# Altium PCB PCB2.PcbDoc
Units mm, origin at the board's own origin, x right, y up, seen from the top; angles counter-clockwise.
Board outline 76.2 x 72.39 mm, 2 copper layers (Top Layer, Bottom Layer); 20 components, 25 nets, 102 pads, 0 vias.
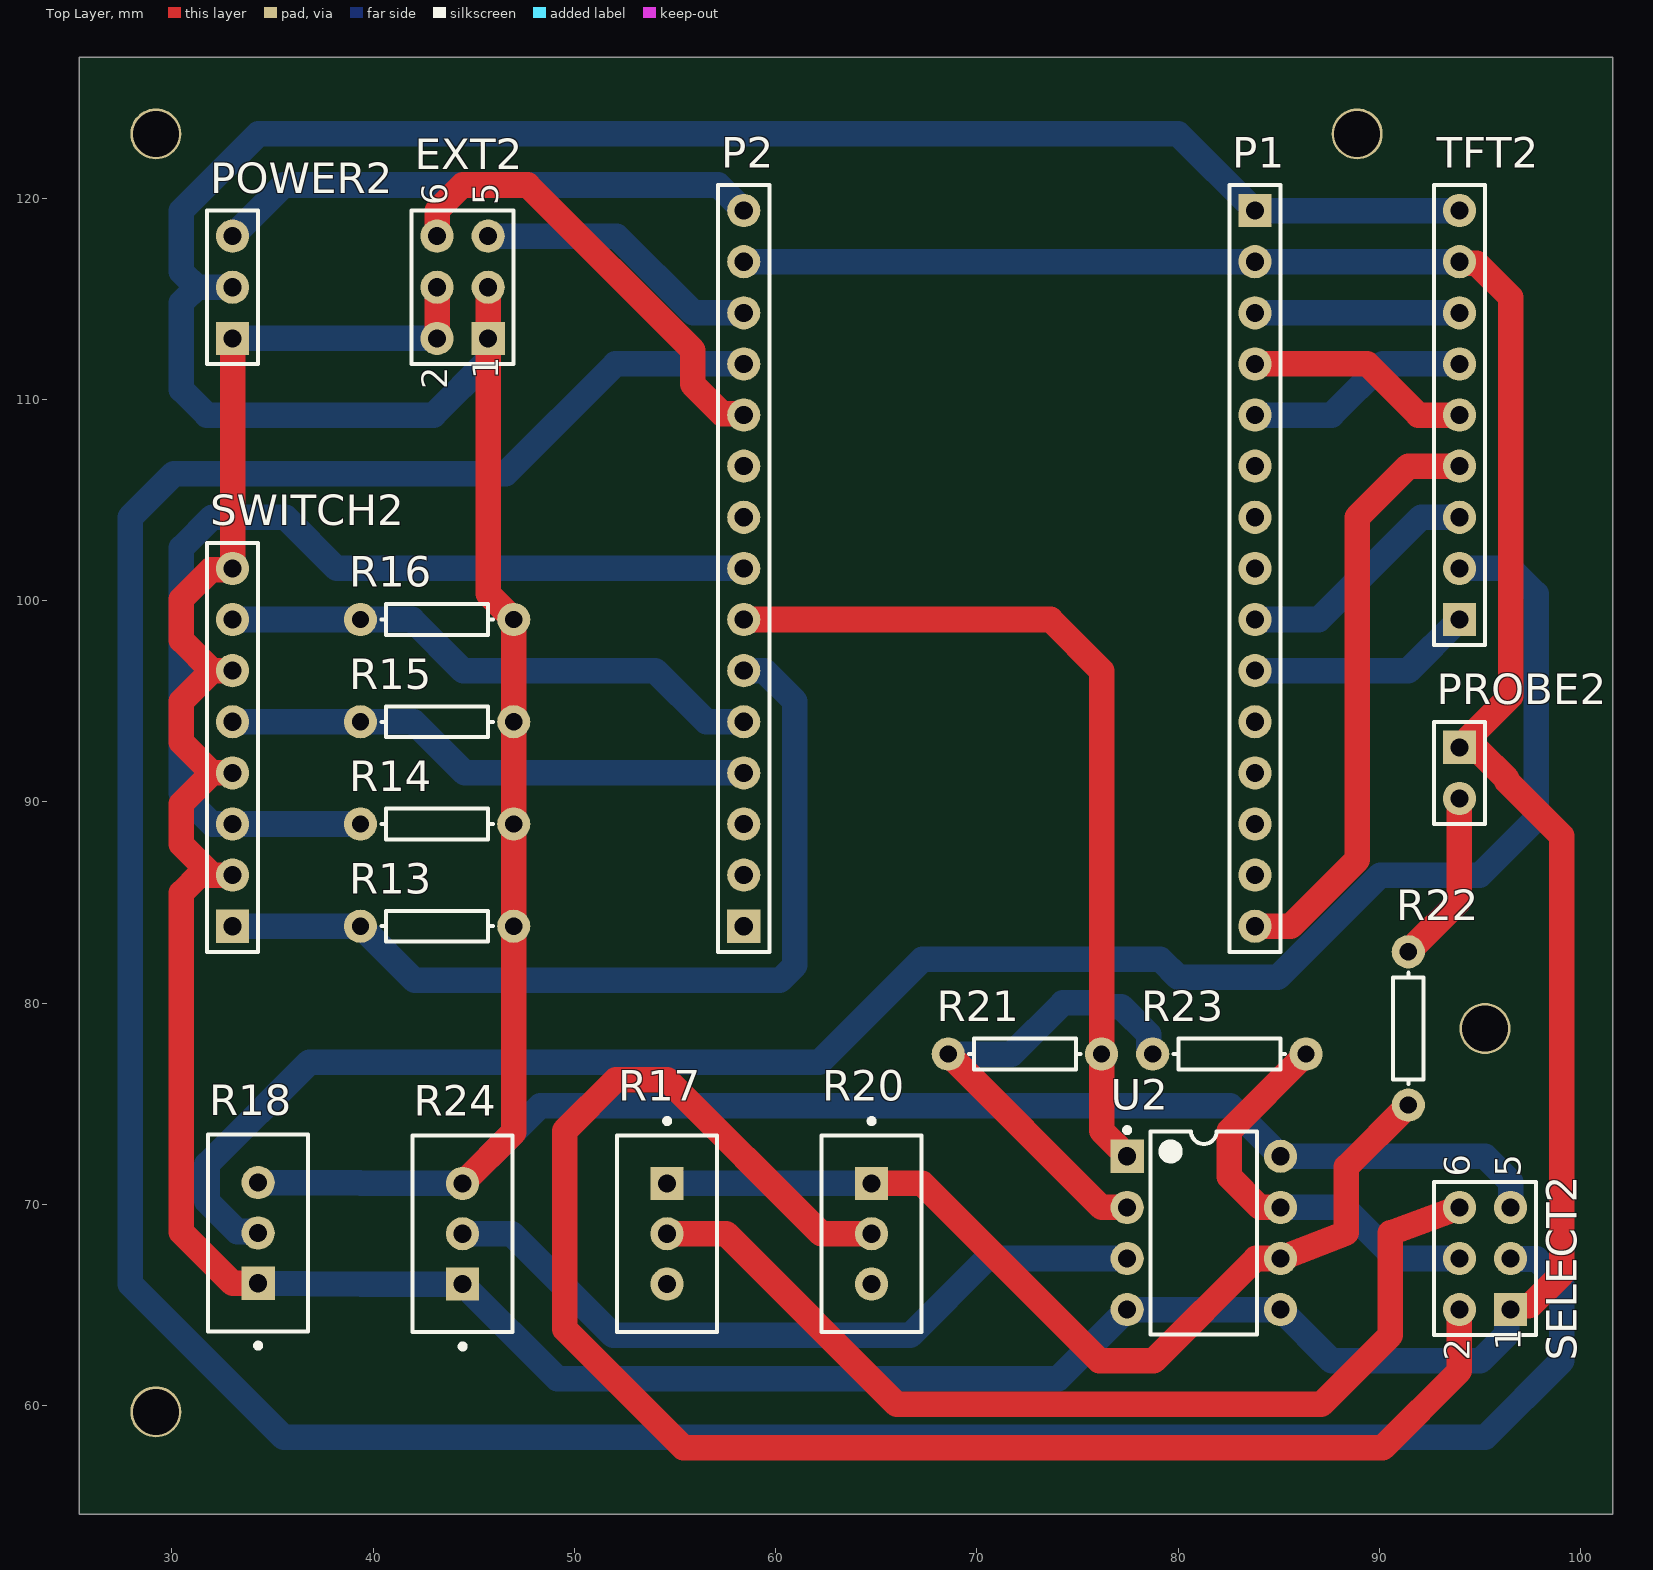
[diagram p0: Top Layer view]
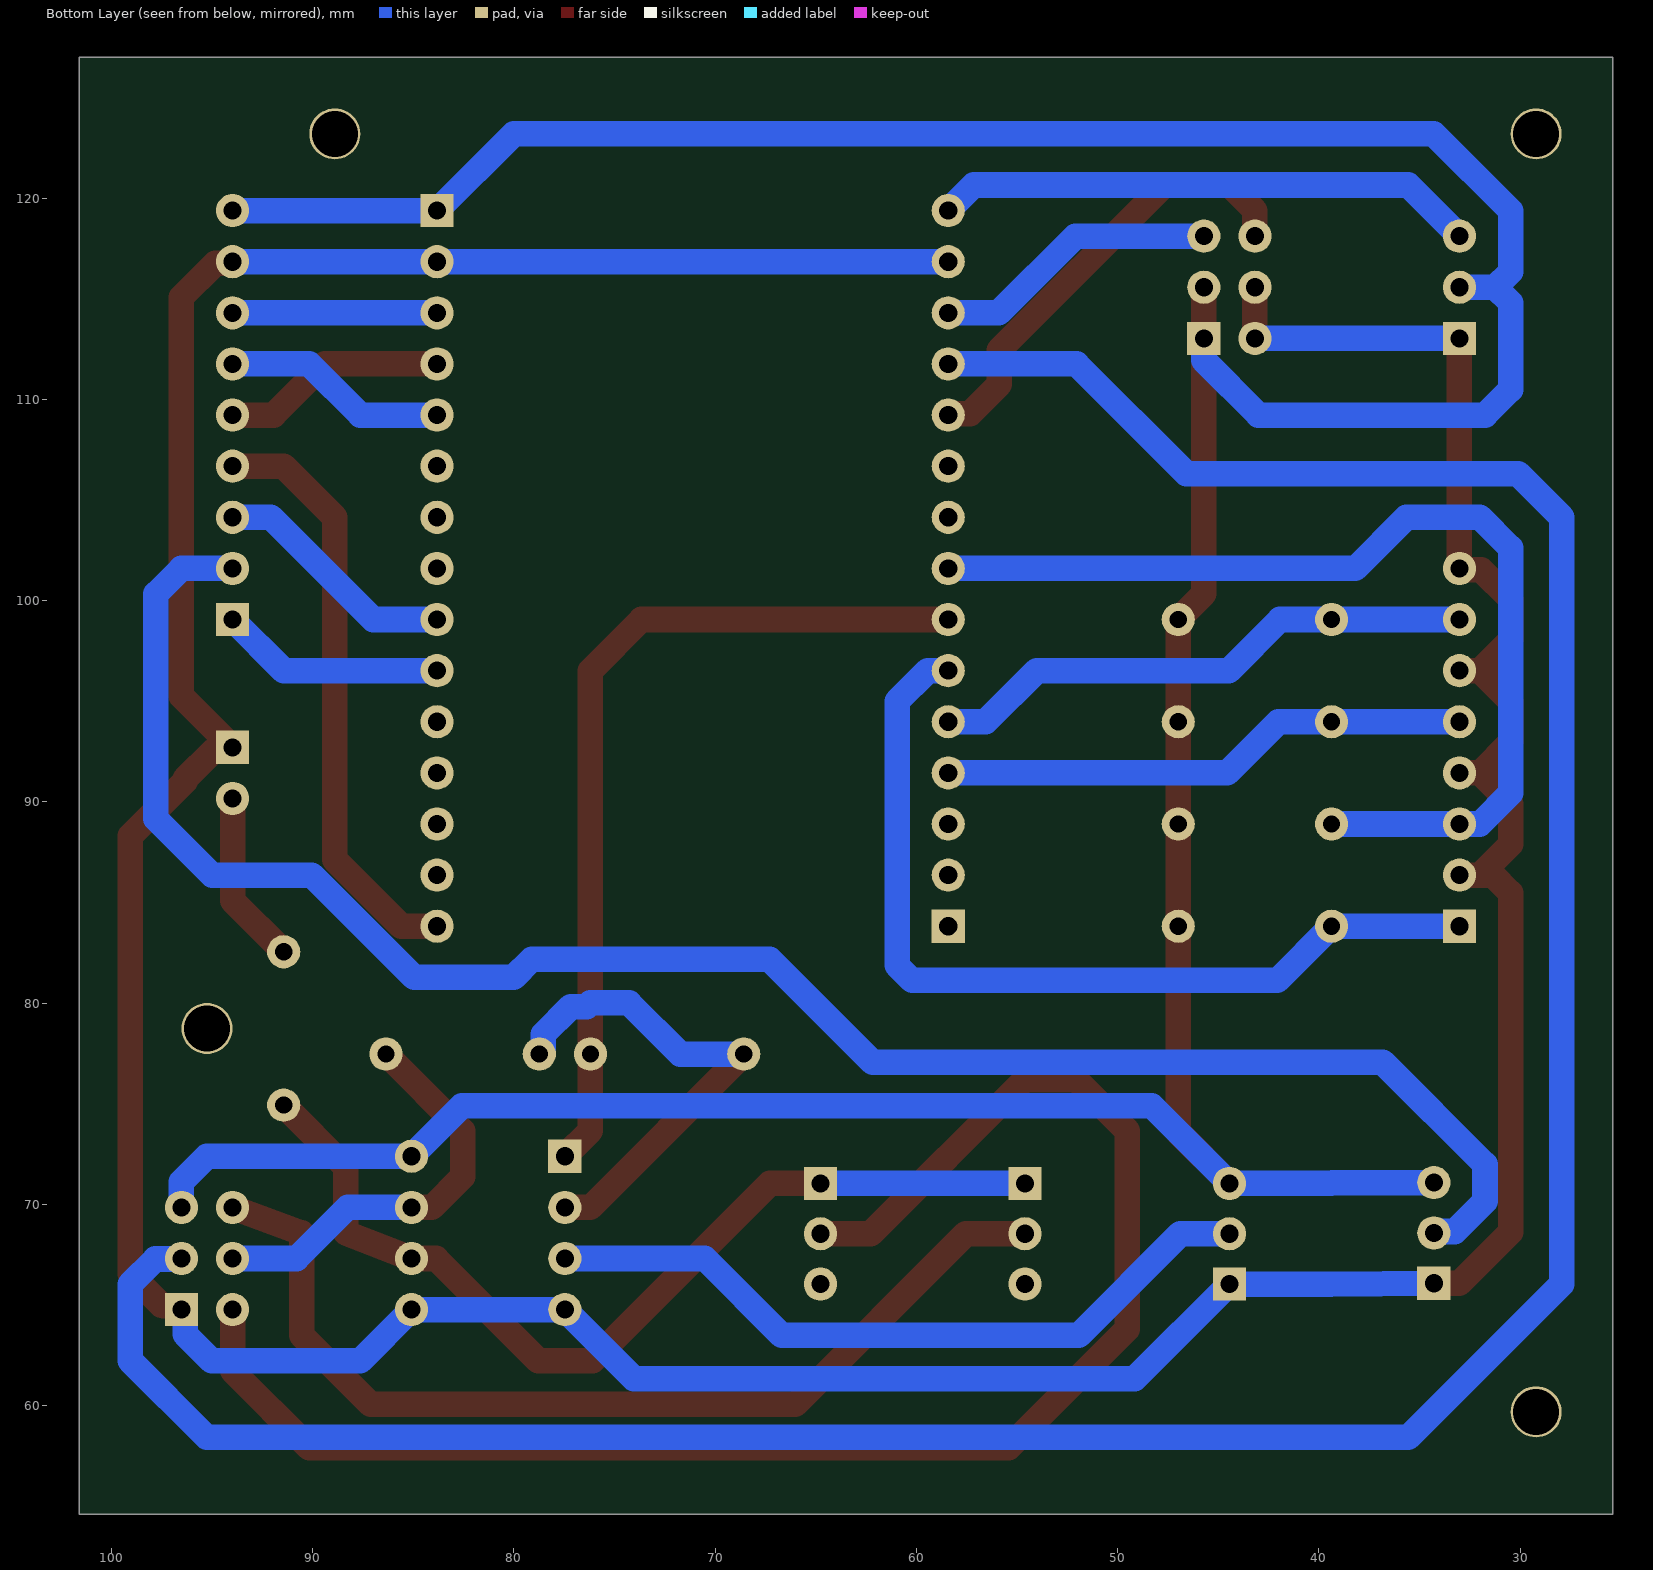
[diagram p1: Bottom Layer view, seen from below]

## Layer stack, top to bottom
Top Solder: solder mask 0.0102, Solder Resist, Dk 3.5
Top Layer: signal copper 0.0356
Dielectric 1: dielectric 0.32, FR-4, Dk 4.8
Bottom Layer: signal copper 0.0356
Bottom Solder: solder mask 0.0102, Solder Resist, Dk 3.5

## Board outline
25.4,54.61 101.6,54.61 101.6,127 25.4,127

## Design rules (kind name [scope] priority, off if disabled: settings)
Clearance [All] p1: gap=0.889 ignorepadtopadclearanceinfootprint=FALSE except(0: Arc-Hole Track-Hole SMDPad-Hole THPad-Hole Via-Hole Fill-Hole Poly-Hole Region-Hole Text-Hole; 0.838: THPad-THPad)
PolygonConnect [All] p1: connectstyle=Relief reliefconductorwidth=0.254 reliefentries=4 polygonreliefangle="90 Angle" airgapwidth=0.254
RoutingVias [All] p1: holewidth=0.711 width=1.27 viastyle="Through Hole" minholewidth=0.711 minwidth=1.27 maxholewidth=0.711 maxwidth=1.27
SolderMaskExpansion [All] p1: expansion=0.102 istentingtop=FALSE
Width [All] p1: maxlimit=1.524 minlimit=1.016 preferedwidth=1.27 minimp=50.000000 maximp=50.000000 favimp=50.000000
30 further rules are at their usual default settings.

## Components (designator, comment, footprint, x,y, rotation, side; value= is the part's Value field where it differs from the comment)
EXT2 "Header 3X2" HDR2X3 45.72,113.03 r90 top
P1 "Header 15" HDR1X15 83.82,119.38 r270 top
P2 "Header 15" HDR1X15 58.42,83.82 r90 top
POWER2 "Header 3" HDR1X3 33.02,113.03 r90 top
PROBE2 "Header 2" HDR1X2 93.98,92.71 r270 top
R13 "Res1" AXIAL-0.3 43.18,83.82 r0 top value=10K
R14 "Res1" AXIAL-0.3 43.18,88.9 r0 top value=10K
R15 "Res1" AXIAL-0.3 43.18,93.98 r0 top value=10K
R16 "Res1" AXIAL-0.3 43.18,99.06 r0 top value=10K
R17 "10K" FP-PV36W-MFG 54.61,68.54 r90 top value=1kΩ
R18 "PV36W102C01B00" FP-PV36W-MFG 34.29,68.58 r270 top value=1kΩ
R20 "100K" FP-PV36W-MFG 64.77,68.54 r90 top value=1kΩ
R21 "Res1" AXIAL-0.3 72.39,77.47 r180 top value=100K
R22 "Res1" AXIAL-0.3 91.44,78.74 r90 top value=100K
R23 "Res1" AXIAL-0.3 82.55,77.47 r0 top value=100K
R24 "100K" FP-PV36W-MFG 44.45,68.54 r270 top value=1kΩ
SELECT2 "Header 3X2" HDR2X3 96.52,64.77 r90 top
SWITCH2 "Header 8" HDR1X8 33.02,83.82 r90 top
TFT2 "Header 9" HDR1X9 93.98,99.06 r90 top
U2 "LM358N" ONSC-PDIP-8-626-05_M 81.28,68.58 r0 top

## Footprints (in the part's own frame and the unit in brackets; to place one, negate y for a bottom-side part, rotate by r counter-clockwise, add the part's x,y. Pads: shape width x height; smd on the part's side, far side on the other; paste and mask are expansions set on the pad)
AXIAL-0.3 [mil] "Axial Device, Thru-Hole; 2 Leads; 0.3 in Pin Spacing"
  round 65 hole 33.46: 1(-150,0) 2(150,0)
  silkscreen extent -109,-30 109,30
FP-PV36W-MFG [mil]
  rect 65x65 hole 35.43 paste-39370.1 mask+0: 1(98.42,0)
  round 65 hole 35.43 paste-39370.1 mask+0: 2(0,0) 3(-98.43,0)
  silkscreen extent -193,-98 225,98, body extent -196,-102 196,102, height 10
HDR1X2 [mil] "Connector; Header; 2 Position"
  rect 65x65 hole 35.43: 1(0,0)
  round 65 hole 35.43: 2(100,0)
  silkscreen extent -50,-50 150,50
HDR1X3 [mil] "Connector; Header; 3 Position"
  rect 65x65 hole 35.43: 1(0,0)
  round 65 hole 35.43: 2(100,0) 3(200,0)
  silkscreen extent -50,-50 250,50
HDR1X8 [mil] "Connector; Header; 8 Position"
  rect 65x65 hole 35.43: 1(0,0)
  round 65 hole 35.43: 2(100,0) 3(200,0) 4(300,0) 5(400,0) 6(500,0) 7(600,0) 8(700,0)
  silkscreen extent -50,-50 750,50
HDR1X9 [mil] "Connector; Header; 9 Position"
  rect 65x65 hole 35.43: 1(0,0)
  round 65 hole 35.43: 2(100,0) 3(200,0) 4(300,0) 5(400,0) 6(500,0) 7(600,0) 8(700,0) 9(800,0)
  silkscreen extent -50,-50 850,50
HDR1X15 [mil] "Connector; Header; 15 Position"
  rect 65x65 hole 35.43: 1(0,0)
  round 65 hole 35.43: 2(100,0) 3(200,0) 4(300,0) 5(400,0) 6(500,0) 7(600,0) 8(700,0) 9(800,0) 10(900,0) 11(1000,0) 12(1100,0) 13(1200,0) 14(1300,0) 15(1400,0)
  silkscreen extent -50,-50 1450,50
HDR2X3 [mil] "Connector; Header; 3x2 Position"
  rect 65x65 hole 35.43: 1(0,0)
  round 65 hole 35.43: 2(0,100) 3(100,0) 4(100,100) 5(200,0) 6(200,100)
  silkscreen extent -50,-50 250,150
ONSC-PDIP-8-626-05_M [mil] "DIP, 8-Leads, Body 10x7.1mm, Pitch 2.54mm"
  rect 65x65 hole 35.43: 1(-150,150)
  round 65 hole 35.43: 2(-150,50) 3(-150,-50) 4(-150,-150) 5(150,-150) 6(150,-50) 7(150,50) 8(150,150)
  silkscreen extent -155,-199 104,206, body extent -155,-197 155,197, height 210

## Part data
EXT2 SELECT2: "Header, 3-Pin, Dual row", LatestRevisionDate=17-Jul-2002, LatestRevisionNote="Re-released for DXP Platform.", Publisher="Altium Limited"
P1 P2: "Header, 15-Pin", LatestRevisionDate=17-Jul-2002, LatestRevisionNote="Re-released for DXP Platform.", Publisher="Altium Limited"
POWER2: "Header, 3-Pin", LatestRevisionDate=17-Jul-2002, LatestRevisionNote="Re-released for DXP Platform.", Publisher="Altium Limited"
PROBE2: "Header, 2-Pin", LatestRevisionDate=17-Jul-2002, LatestRevisionNote="Re-released for DXP Platform.", Publisher="Altium Limited"
R13 R14 R15 R16 R21 R22 R23: "Resistor", LatestRevisionDate=17-Jul-2002, LatestRevisionNote="Re-released for DXP Platform.", PackageDescription="Axial Device, Thru-Hole; 2 Leads; 0.3 in Pin Spacing", PackageReference=AXIAL-0.3, Published=8-Jun-2000, Publisher="Altium Limited"
R17 R20 R24: library part CMP-07234-000009-1, "TRIMMER 1K OHM 0.5W PC PIN TOP", Manufacturer=Bourns, Manufacturer Part Number=PV36W102C01B00, Package=PV36W, Power Rating=0.5W, Resistance=1kΩ, Temperature="-55°C to +125°C", Temperature Coefficient=100ppm/°C, Temperature Range High=+125°C, Temperature Range Low=-55°C, Tolerance=10%, Automotive=No, Category=Res, ComponentLink2Description=Datasheet, ComponentLink2URL=https://www.bourns.com/docs/Product-Datasheets/pv36.pdf, Composition=Cermet, Device Class L1="Passive Components", Device Class L2=Resistors, Device Class L3="Variable Resistors and Potentiometers", Digikey Description="TRIMMER 1K OHM 0.5W PC PIN TOP", Height=12.05mm, Lead Free=Yes, Mouser Description="Trimmer Resistors - Through Hole 1.0Kohms 10mm Square 25turn", Octopart=https://octopart.com/pv36w102c01b00-bourns-71612321, RoHS=TRUE, Series=PV36, Standoff Height=0.38mm
R18: library part CMP-07234-000009-1, "TRIMMER 1K OHM 0.5W PC PIN TOP", Manufacturer=Bourns, Package=PV36W, Power Rating=0.5W, Resistance=1kΩ, Temperature="-55°C to +125°C", Temperature Coefficient=100ppm/°C, Temperature Range High=+125°C, Temperature Range Low=-55°C, Tolerance=10%, Automotive=No, Category=Res, ComponentLink2Description=Datasheet, ComponentLink2URL=https://www.bourns.com/docs/Product-Datasheets/pv36.pdf, Composition=Cermet, Device Class L1="Passive Components", Device Class L2=Resistors, Device Class L3="Variable Resistors and Potentiometers", Digikey Description="TRIMMER 1K OHM 0.5W PC PIN TOP", Height=12.05mm, Lead Free=Yes, Manufacturer Part Number=PV36W102C01B00, Mouser Description="Trimmer Resistors - Through Hole 1.0Kohms 10mm Square 25turn", Octopart=https://octopart.com/pv36w102c01b00-bourns-71612321, RoHS=TRUE, Series=PV36, Standoff Height=0.38mm
SWITCH2: "Header, 8-Pin", LatestRevisionDate=17-Jul-2002, LatestRevisionNote="Re-released for DXP Platform.", Publisher="Altium Limited"
TFT2: "Header, 9-Pin", LatestRevisionDate=17-Jul-2002, LatestRevisionNote="Re-released for DXP Platform.", Publisher="Altium Limited"
U2: library part CMP-1310-00098-1, "Single Supply Dual Operational Amplifier, 3 to 32 V, 0 to 70 degC, 8-Pin PDIP, Tube", Manufacturer="On Semiconductor", ComponentLink1Description="Manufacturer URL", ComponentLink1URL=http://www.onsemi.com/, ComponentLink2Description=Datasheet, ComponentLink2URL=http://www.onsemi.cn/pub_link/Collateral/LM358-D.PDF, ComponentLink3Description="Package Specification", ComponentLink3URL=http://www.onsemi.com/pub_link/Collateral/LM211-D.PDF, DatasheetVersion="Rev. 27", Mounting Technology="Through Hole", PackageDescription="8-Pin Plastic Dual-In Line Package, Body 9.52 x 6.605 mm, Pitch 2.54 mm", PackageReference=PDIP-8-626-05, PackageVersion="Rev. M, 04/2010", Packing=Tube, PartNumber=LM358N, RoHS=FALSE, VCC Max (V)=32, VCC Min (V)=3

## Free pads (board coordinates)
  round 2.54 hole 2.286: 3(29.21,59.69) 3(29.21,123.19) 3(88.9,123.19) 3(95.25,78.74)

## Nets (pads, with @x,y where several pads share a name; then routed paths per layer and width w, separated by ;. In a path a pad name is that pad's centre, name@x,y a point inside that pad or via, vN(x,y) a via of type N, cw(c..) or ccw(c..) an arc to the next point about the centre after c; other vN are vias at no path point)
ADC_IN: P2.7 R21.1 U2.1 | length 43.5
  Top Layer w1.27: P2.7 73.66,99.06 76.2,96.52 R21.1 76.2,73.66 U2.1
BTN1: P2.6 R13.1 SWITCH2.1 | length 45.7
  Bottom Layer w1.27: SWITCH2.1 R13.1 42.062,81.128 60.216,81.128 60.96,81.872 60.96,94.996 59.436,96.52 P2.6
BTN2: P2.8 R14.1 SWITCH2.3 | length 51.3
  Bottom Layer w1.27: R14.1 SWITCH2.3 32.004,88.9 30.48,90.424 30.48,102.616 32.004,104.14 35.649,104.14 38.189,101.6 P2.8
BTN3: P2.4 R15.1 SWITCH2.5 | length 26.5
  Bottom Layer w1.27: SWITCH2.5 R15.1 42.012,93.98 44.552,91.44 P2.4
BTN4: P2.1 P2.5 R16.1 SWITCH2.7 | length 27.5
  Bottom Layer w1.27: SWITCH2.7 R16.1 41.935,99.06 44.475,96.52 54.026,96.52 56.566,93.98 P2.5
CS: P1.3 TFT2.7 | length 10.2
  Bottom Layer w1.27: P1.3 TFT2.7
DC: P1.4 TFT2.5 | length 11.2
  Top Layer w1.27: P1.4 89.408,111.76 91.948,109.22 TFT2.5
GND: EXT2.2 EXT2.4 P1.2 P2.14 POWER2.1 PROBE2.1 R18.1 R24.1 SELECT2.1 SWITCH2.2 SWITCH2.4 SWITCH2.6 SWITCH2.8 TFT2.8 U2.4 U2.5 | length 233.4
  Top Layer w1.27: SWITCH2.2 32.004,86.36 ; SWITCH2.4 32.004,91.44 ; SWITCH2.6 32.004,96.52 ; POWER2.1 SWITCH2.8 32.947,101.527 31.931,101.527 30.48,100.076 30.48,98.044 32.004,96.52 ; R18.1 33.02,66.08 30.48,68.62 30.48,85.471 31.369,86.36 32.004,86.36 ; EXT2.2 EXT2.4 ; TFT2.8 94.053,116.767 94.836,116.767 96.52,115.083 96.52,95.25 PROBE2.1 94.17,92.519 94.953,92.519 96.329,91.143 96.329,91.036 99.06,88.306 99.06,66.527 97.515,64.983 97.454,64.983 97.432,64.96 96.71,64.96 SELECT2.1 ; 32.004,86.36 30.48,87.884 30.48,89.916 32.004,91.44 ; 32.004,91.44 30.48,92.964 30.48,94.996 32.004,96.52
  Bottom Layer w1.27: POWER2.1 EXT2.2 ; R18.1 39.41,66.04 R24.1 49.149,61.341 74.041,61.341 U2.4 U2.5 87.63,62.23 95.021,62.23 96.329,63.538 96.329,64.579 SELECT2.1 ; P2.14 P1.2 TFT2.8
IO13: EXT2.5 P2.13 | length 14.3
  Bottom Layer w1.27: EXT2.5 52.095,118.11 55.905,114.3 P2.13
IO14: EXT2.6 P2.11 | length 22.8
  Top Layer w1.27: EXT2.6 43.18,119.38 44.45,120.65 47.676,120.65 55.88,112.446 55.88,110.744 57.331,109.293 58.347,109.293 P2.11
LED: R18.2 TFT2.2 | length 94.4
  Bottom Layer w1.27: R18.2 34.217,68.653 33.252,68.653 31.75,70.155 31.75,71.984 36.83,77.064 62.179,77.064 67.285,82.169 79.121,82.169 80.01,81.28 84.963,81.28 90.043,86.36 94.996,86.36 97.79,89.154 97.79,100.33 96.52,101.6 TFT2.2
MISO: P1.10 TFT2.1 | length 11.2
  Bottom Layer w1.27: P1.10 91.44,96.52 TFT2.1
MOSI: P1.15 TFT2.4 | length 29.6
  Top Layer w1.27: P1.15 85.598,83.82 88.9,87.122 88.9,104.14 91.44,106.68 TFT2.4
NetPROBE2_2: PROBE2.2 R22.2 | length 8.7
  Top Layer w1.27: R22.2 93.98,85.09 PROBE2.2
NetR17_1: R17.1 R20.1 R22.1 U2.6 | length 47.4
  Top Layer w1.27: R20.1 67.285,71.04 76.095,62.23 78.791,62.23 83.871,67.31 U2.6 88.367,68.58 88.367,71.857 R22.1
  Bottom Layer w1.27: R17.1 R20.1
NetR17_2: R17.2 SELECT2.6 | length 49.6
  Top Layer w1.27: R17.2 57.546,68.54 66.015,60.071 87.122,60.071 90.551,63.5 90.551,68.58 SELECT2.6
NetR20_2: R20.2 SELECT2.2 | length 80.8
  Top Layer w1.27: R20.2 62.27,68.54 54.61,76.2 52.07,76.2 49.53,73.66 49.53,63.805 55.423,57.912 90.17,57.912 93.98,61.722 SELECT2.2
NetR21_2: R21.2 R23.1 U2.2 | length 24.7
  Top Layer w1.27: R21.2 76.2,69.85 U2.2
  Bottom Layer w1.27: R21.2 71.741,77.47 74.281,80.01 76.2,80.01 76.391,79.819 77.173,79.819 78.549,78.443 78.549,77.764 78.715,77.598 R23.1@78.715,77.495
NetR23_2: R23.2 SELECT2.4 U2.7 | length 20.8
  Top Layer w1.27: U2.7 84.074,69.85 82.55,71.374 82.55,73.66 R23.2
  Bottom Layer w1.27: U2.7 88.265,69.85 90.805,67.31 SELECT2.4 ; R23.2@86.335,77.445 R23.2
NetR24_2: P1.13 R24.2 U2.3 | length 36.7
  Bottom Layer w1.27: R24.2 46.888,68.54 51.928,63.5 66.7,63.5 70.51,67.31 U2.3
RESET: P1.5 TFT2.6 | length 11.2
  Bottom Layer w1.27: P1.5 87.63,109.22 90.17,111.76 TFT2.6
SCK: P1.9 TFT2.3 | length 12.3
  Bottom Layer w1.27: P1.9 86.995,99.06 92.075,104.14 TFT2.3
SS: P1.12 P2.12 SELECT2.3 | length 154.5
  Bottom Layer w1.27: P2.12 52.045,111.76 46.584,106.299 30.099,106.299 27.94,104.14 27.94,66.04 35.56,58.42 95.25,58.42 99.06,62.23 99.06,66.04 97.816,67.284 96.546,67.284 SELECT2.3
V5: P2.15 POWER2.3 | length 27
  Bottom Layer w1.27: POWER2.3 35.56,120.65 57.15,120.65 P2.15
VCC: EXT2.1 EXT2.3 P1.1 POWER2.2 R13.2 R14.2 R15.2 R16.2 R18.3 R24.3 SELECT2.5 TFT2.9 U2.8 | length 208.7
  Top Layer w1.27: R24.3 46.99,73.58 R13.2 R14.2 R15.2 R16.2 45.72,100.33 EXT2.1 EXT2.3
  Bottom Layer w1.27: POWER2.2 31.242,115.57 ; R18.3 39.345,71.08 39.385,71.04 R24.3 48.302,74.892 82.588,74.892 U2.8 95.25,72.39 96.52,71.12 SELECT2.5 ; EXT2.1 45.72,111.938 43.002,109.22 31.75,109.22 30.48,110.49 30.48,114.808 31.242,115.57 ; TFT2.9 P1.1 80.01,123.19 34.29,123.19 30.48,119.38 30.48,116.332 31.242,115.57
pads on no net: P1.6 P1.7 P1.8 P1.11 P1.14 P2.2 P2.3 P2.9 P2.10 R17.3 R20.3

## Silkscreen, mask and mechanical layers (free items; w line width, h text height)
Drill Drawing:
  the board outline again, w0.8

## Text inside footprints (layer, text, board x,y; h text height)
EXT2: Top Overlay "6" at 43.688,119.634 h1.27 r90; Top Overlay "5" at 46.228,119.634 h1.27 r90; Top Overlay "2" at 43.688,110.49 h1.27 r90; Top Overlay "1" at 46.228,110.998 h1.27 r90
SELECT2: Top Overlay "6" at 94.488,71.374 h1.27 r90; Top Overlay "5" at 97.028,71.374 h1.27 r90; Top Overlay "2" at 94.488,62.23 h1.27 r90; Top Overlay "1" at 97.028,62.738 h1.27 r90